# EAGLE board Qwiic_Multi_Port_Board-Panel (EAGLE 9.6.2), part 1 of 2
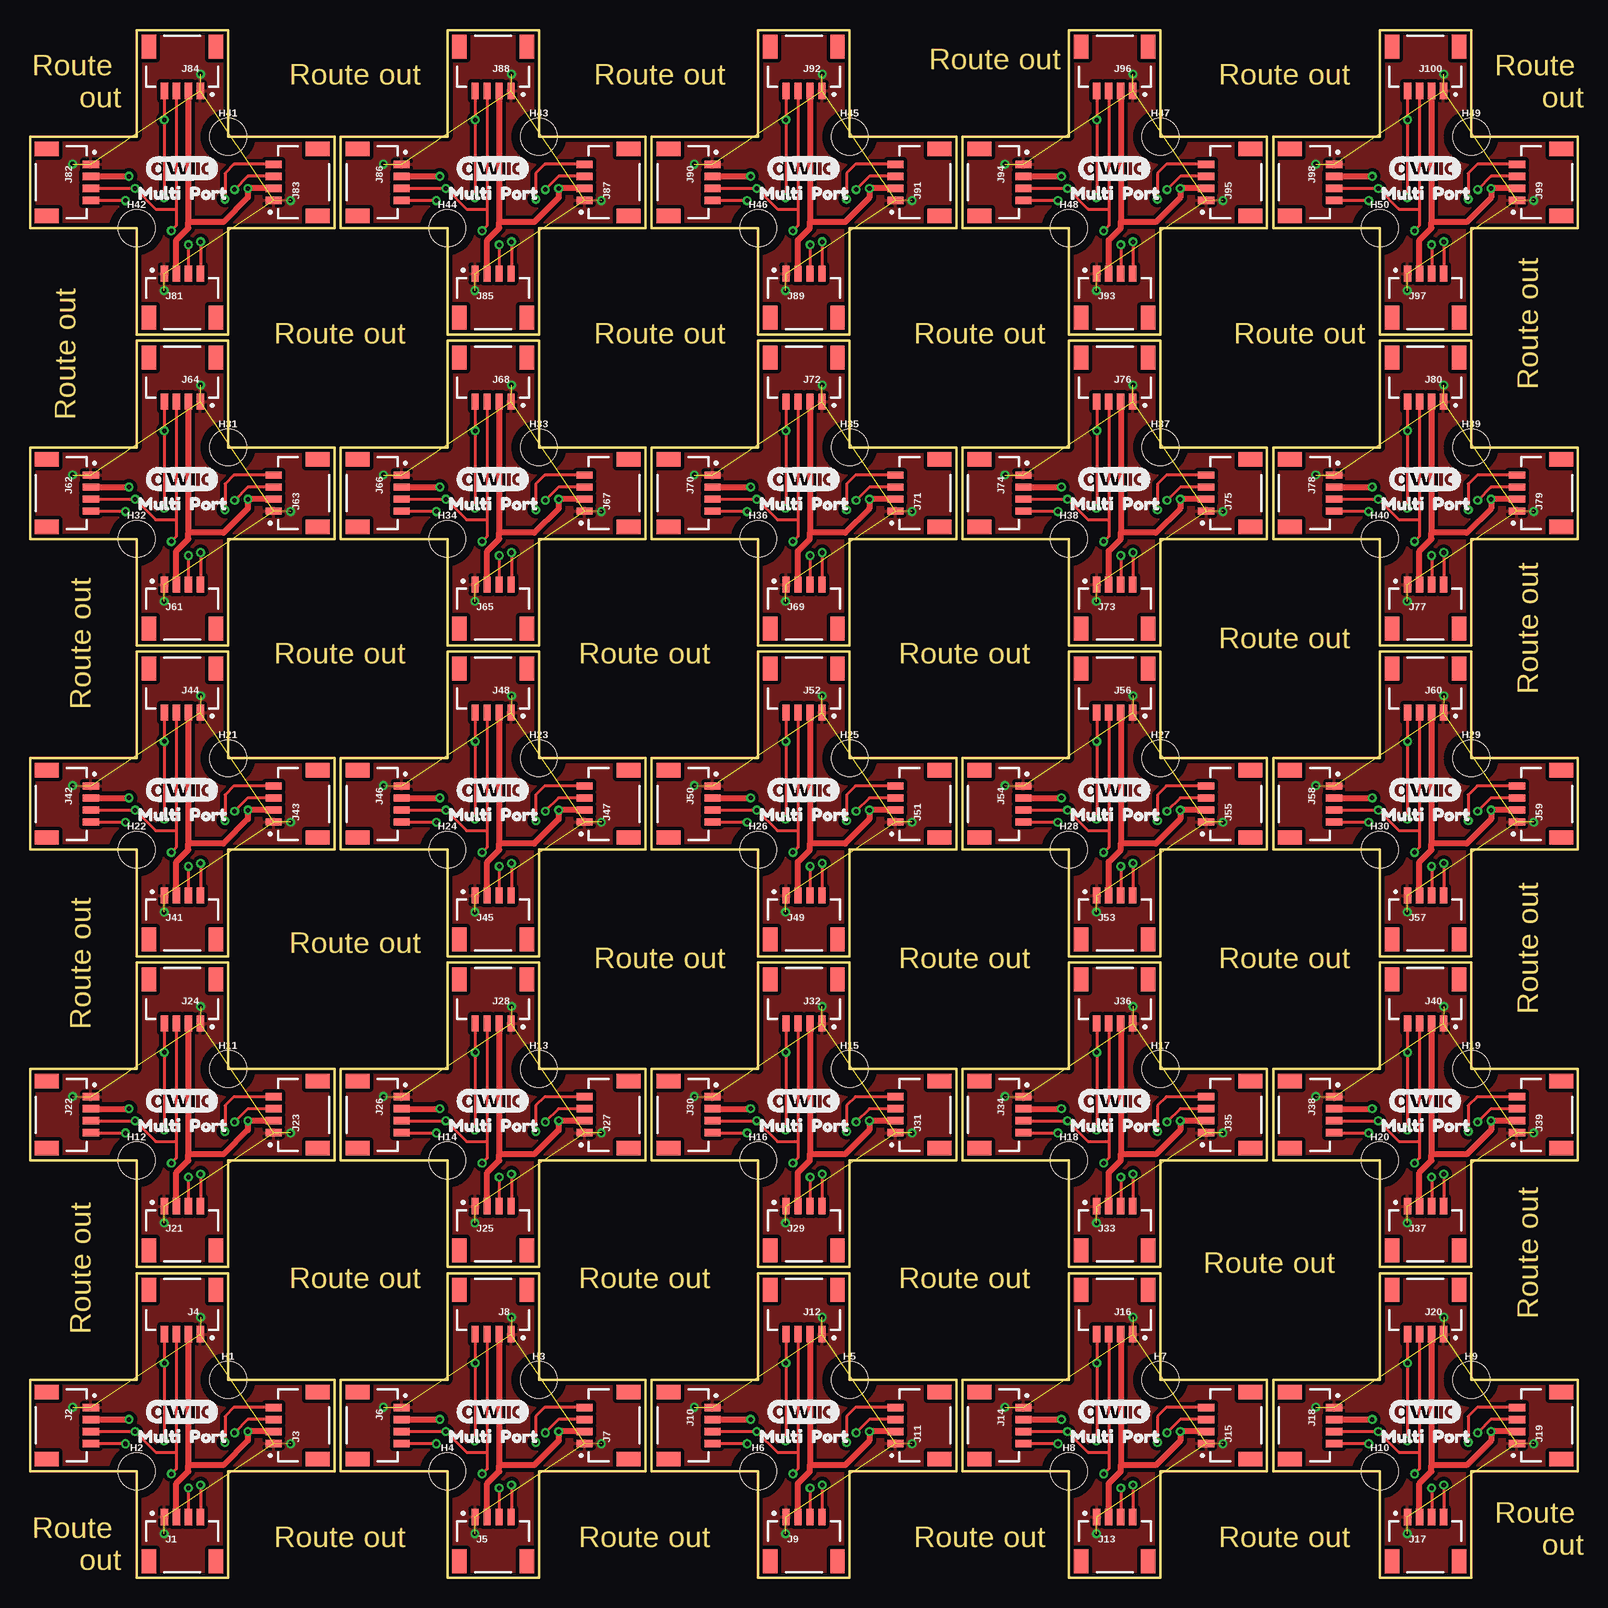
[diagram p0: board, top side]
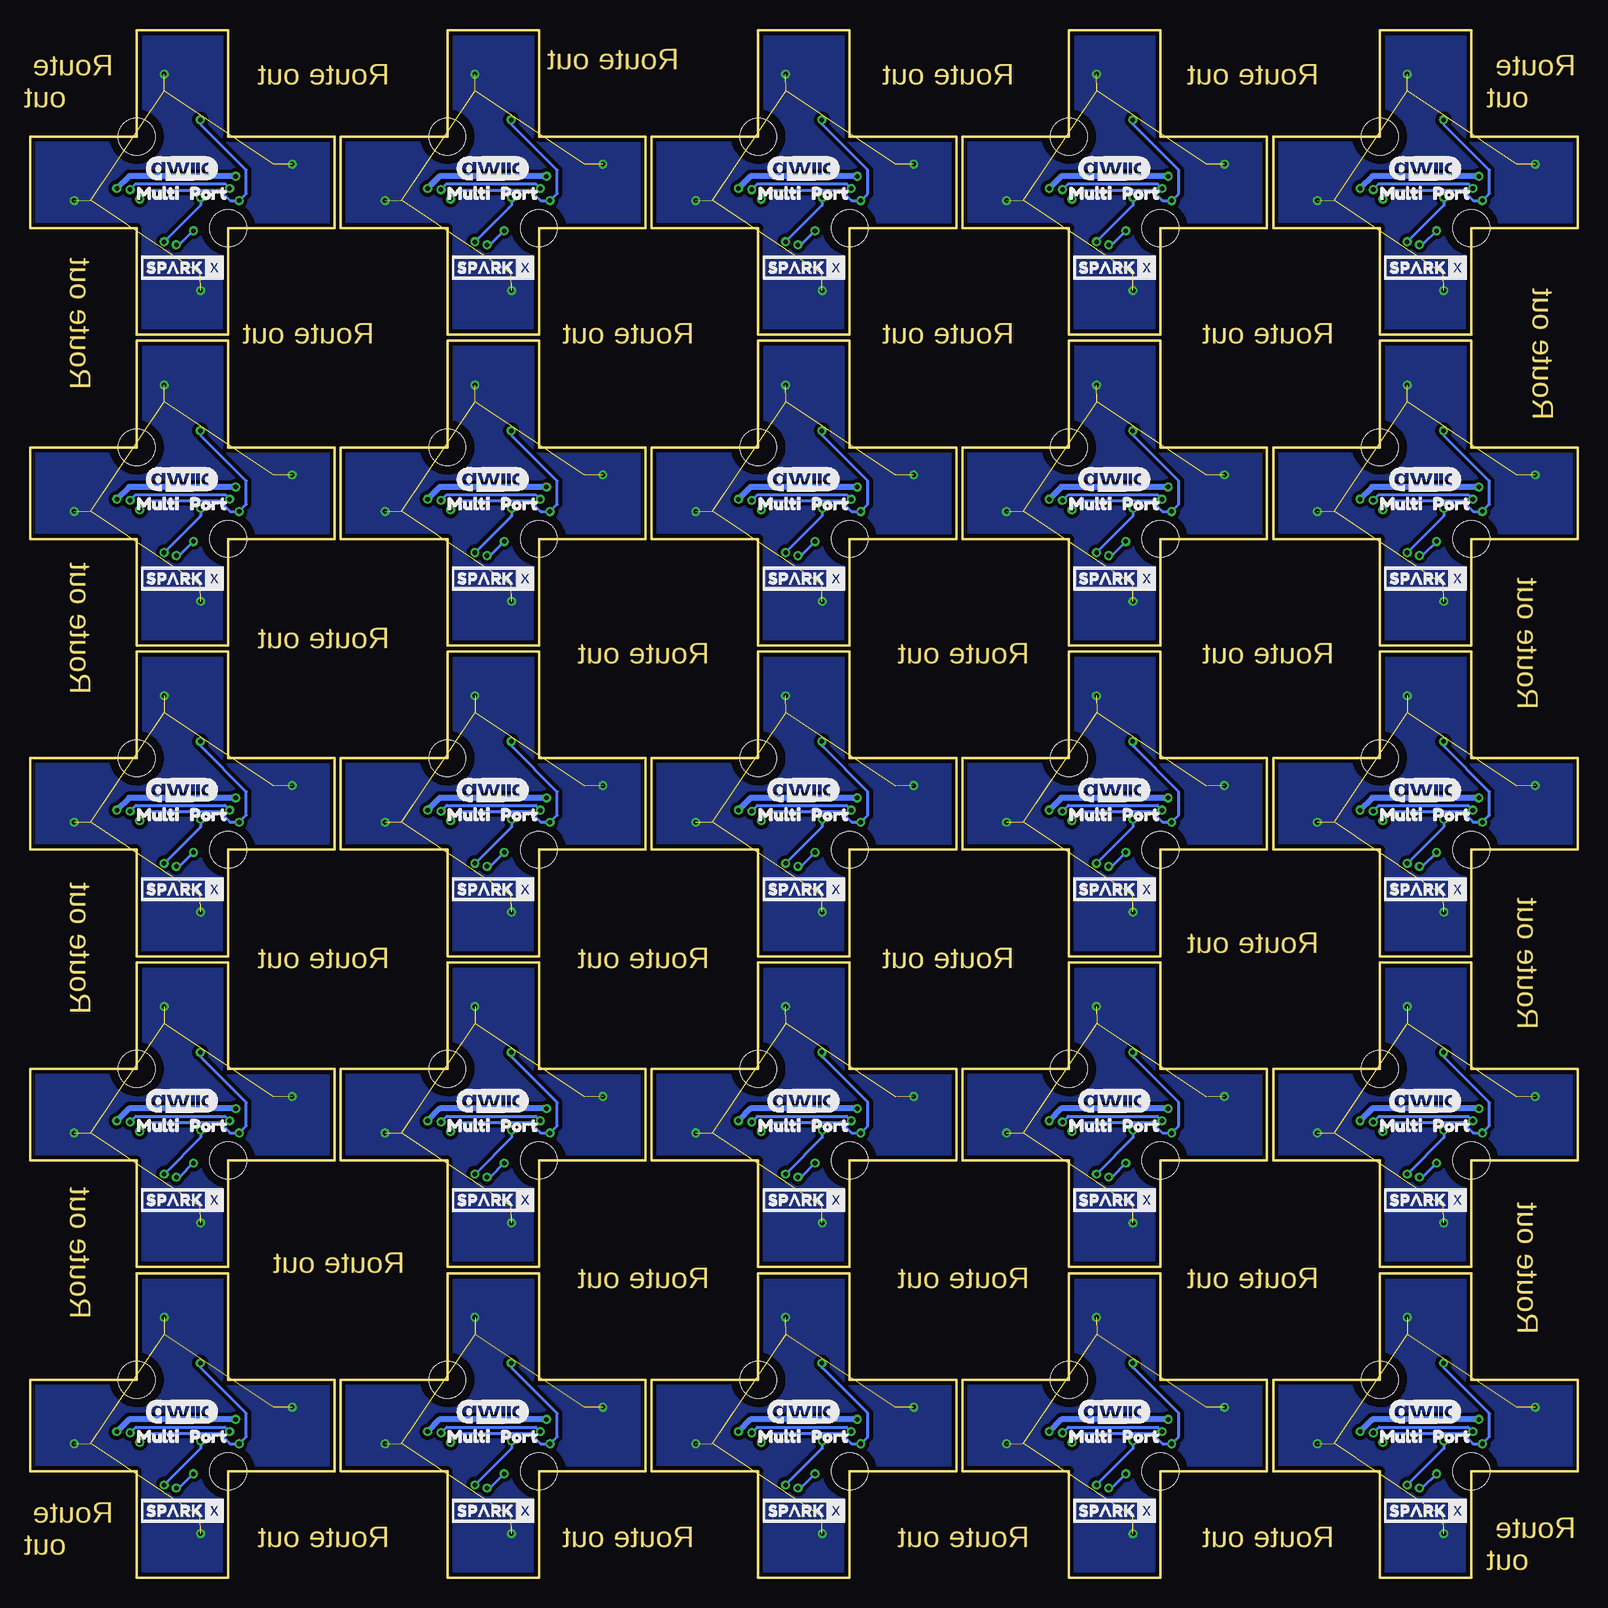
[diagram p1: board, bottom side, seen from below]

Size 129.03 x 129.03 mm. Coordinates in mm from the lower left corner, seen from the top.
Outline: 8.89,0 16.51,0 16.51,8.89 25.4,8.89 25.4,16.51 16.51,16.51 16.51,25.4 8.89,25.4 8.89,16.51 0,16.51 0,8.89 8.89,8.89 8.89,0
Outline: 34.8,0 42.42,0 42.42,8.89 51.31,8.89 51.31,16.51 42.42,16.51 42.42,25.4 34.8,25.4 34.8,16.51 25.91,16.51 25.91,8.89 34.8,8.89 34.8,0
Outline: 60.71,0 68.33,0 68.33,8.89 77.22,8.89 77.22,16.51 68.33,16.51 68.33,25.4 60.71,25.4 60.71,16.51 51.82,16.51 51.82,8.89 60.71,8.89 60.71,0
Outline: 86.61,0 94.23,0 94.23,8.89 103.12,8.89 103.12,16.51 94.23,16.51 94.23,25.4 86.61,25.4 86.61,16.51 77.72,16.51 77.72,8.89 86.61,8.89 86.61,0
Outline: 112.52,0 120.14,0 120.14,8.89 129.03,8.89 129.03,16.51 120.14,16.51 120.14,25.4 112.52,25.4 112.52,16.51 103.63,16.51 103.63,8.89 112.52,8.89 112.52,0
Outline: 8.89,25.91 16.51,25.91 16.51,34.8 25.4,34.8 25.4,42.42 16.51,42.42 16.51,51.31 8.89,51.31 8.89,42.42 0,42.42 0,34.8 8.89,34.8 8.89,25.91
Outline: 34.8,25.91 42.42,25.91 42.42,34.8 51.31,34.8 51.31,42.42 42.42,42.42 42.42,51.31 34.8,51.31 34.8,42.42 25.91,42.42 25.91,34.8 34.8,34.8 34.8,25.91
Outline: 60.71,25.91 68.33,25.91 68.33,34.8 77.22,34.8 77.22,42.42 68.33,42.42 68.33,51.31 60.71,51.31 60.71,42.42 51.82,42.42 51.82,34.8 60.71,34.8 60.71,25.91
Outline: 86.61,25.91 94.23,25.91 94.23,34.8 103.12,34.8 103.12,42.42 94.23,42.42 94.23,51.31 86.61,51.31 86.61,42.42 77.72,42.42 77.72,34.8 86.61,34.8 86.61,25.91
Outline: 112.52,25.91 120.14,25.91 120.14,34.8 129.03,34.8 129.03,42.42 120.14,42.42 120.14,51.31 112.52,51.31 112.52,42.42 103.63,42.42 103.63,34.8 112.52,34.8 112.52,25.91
Outline: 8.89,51.82 16.51,51.82 16.51,60.71 25.4,60.71 25.4,68.33 16.51,68.33 16.51,77.22 8.89,77.22 8.89,68.33 0,68.33 0,60.71 8.89,60.71 8.89,51.82
Outline: 34.8,51.82 42.42,51.82 42.42,60.71 51.31,60.71 51.31,68.33 42.42,68.33 42.42,77.22 34.8,77.22 34.8,68.33 25.91,68.33 25.91,60.71 34.8,60.71 34.8,51.82
Outline: 60.71,51.82 68.33,51.82 68.33,60.71 77.22,60.71 77.22,68.33 68.33,68.33 68.33,77.22 60.71,77.22 60.71,68.33 51.82,68.33 51.82,60.71 60.71,60.71 60.71,51.82
Outline: 86.61,51.82 94.23,51.82 94.23,60.71 103.12,60.71 103.12,68.33 94.23,68.33 94.23,77.22 86.61,77.22 86.61,68.33 77.72,68.33 77.72,60.71 86.61,60.71 86.61,51.82
Outline: 112.52,51.82 120.14,51.82 120.14,60.71 129.03,60.71 129.03,68.33 120.14,68.33 120.14,77.22 112.52,77.22 112.52,68.33 103.63,68.33 103.63,60.71 112.52,60.71 112.52,51.82
Outline: 8.89,77.72 16.51,77.72 16.51,86.61 25.4,86.61 25.4,94.23 16.51,94.23 16.51,103.12 8.89,103.12 8.89,94.23 0,94.23 0,86.61 8.89,86.61 8.89,77.72
Outline: 34.8,77.72 42.42,77.72 42.42,86.61 51.31,86.61 51.31,94.23 42.42,94.23 42.42,103.12 34.8,103.12 34.8,94.23 25.91,94.23 25.91,86.61 34.8,86.61 34.8,77.72
Outline: 60.71,77.72 68.33,77.72 68.33,86.61 77.22,86.61 77.22,94.23 68.33,94.23 68.33,103.12 60.71,103.12 60.71,94.23 51.82,94.23 51.82,86.61 60.71,86.61 60.71,77.72
Outline: 86.61,77.72 94.23,77.72 94.23,86.61 103.12,86.61 103.12,94.23 94.23,94.23 94.23,103.12 86.61,103.12 86.61,94.23 77.72,94.23 77.72,86.61 86.61,86.61 86.61,77.72
Outline: 112.52,77.72 120.14,77.72 120.14,86.61 129.03,86.61 129.03,94.23 120.14,94.23 120.14,103.12 112.52,103.12 112.52,94.23 103.63,94.23 103.63,86.61 112.52,86.61 112.52,77.72
Outline: 8.89,103.63 16.51,103.63 16.51,112.52 25.4,112.52 25.4,120.14 16.51,120.14 16.51,129.03 8.89,129.03 8.89,120.14 0,120.14 0,112.52 8.89,112.52 8.89,103.63
Outline: 34.8,103.63 42.42,103.63 42.42,112.52 51.31,112.52 51.31,120.14 42.42,120.14 42.42,129.03 34.8,129.03 34.8,120.14 25.91,120.14 25.91,112.52 34.8,112.52 34.8,103.63
Outline: 60.71,103.63 68.33,103.63 68.33,112.52 77.22,112.52 77.22,120.14 68.33,120.14 68.33,129.03 60.71,129.03 60.71,120.14 51.82,120.14 51.82,112.52 60.71,112.52 60.71,103.63
Outline: 86.61,103.63 94.23,103.63 94.23,112.52 103.12,112.52 103.12,120.14 94.23,120.14 94.23,129.03 86.61,129.03 86.61,120.14 77.72,120.14 77.72,112.52 86.61,112.52 86.61,103.63
Outline: 112.52,103.63 120.14,103.63 120.14,112.52 129.03,112.52 129.03,120.14 120.14,120.14 120.14,129.03 112.52,129.03 112.52,120.14 103.63,120.14 103.63,112.52 112.52,112.52 112.52,103.63
Copper layers (1*16): Top 0.035mm / dielectric 1.5mm / Bottom 0.035mm
Design rules "Qwiic_Multi_Port_Board": minimum track width 7mil, minimum drill 15mil, track to track 7mil, track to pad 7mil, pad to pad 7mil, via to via 7mil, smd to smd 7mil, copper to edge 7mil, drill to drill 7mil, minimum pad ring 7mil, minimum via ring 7mil, stop-mask expansion 4mil, vias tented up to drill 25mil, thermal gap 10mil

## Footprints (pad centres in the part's own frame; a part is rotated, then mirrored left to right if it is on the bottom)
STAND-OFF-TIGHT = hole 3.048: 0,0
JST04_1MM_RA = smd 0.6 x 1.35: 1 -1.5,0; 2 -0.5,0; 3 0.5,0; 4 1.5,0 | smd 1.2 x 2: NC1 2.8,-3.675; NC2 -2.8,-3.675

## Placement (x,y rotation side)
H1  STAND-OFFTIGHT  [STAND-OFF-TIGHT]  16.51,16.51 0 top
H2  STAND-OFFTIGHT  [STAND-OFF-TIGHT]  8.89,8.89 0 top
H3  STAND-OFFTIGHT  [STAND-OFF-TIGHT]  42.42,16.51 0 top
H4  STAND-OFFTIGHT  [STAND-OFF-TIGHT]  34.8,8.89 0 top
H5  STAND-OFFTIGHT  [STAND-OFF-TIGHT]  68.33,16.51 0 top
H6  STAND-OFFTIGHT  [STAND-OFF-TIGHT]  60.71,8.89 0 top
H7  STAND-OFFTIGHT  [STAND-OFF-TIGHT]  94.23,16.51 0 top
H8  STAND-OFFTIGHT  [STAND-OFF-TIGHT]  86.61,8.89 0 top
H9  STAND-OFFTIGHT  [STAND-OFF-TIGHT]  120.14,16.51 0 top
H10  STAND-OFFTIGHT  [STAND-OFF-TIGHT]  112.52,8.89 0 top
H11  STAND-OFFTIGHT  [STAND-OFF-TIGHT]  16.51,42.42 0 top
H12  STAND-OFFTIGHT  [STAND-OFF-TIGHT]  8.89,34.8 0 top
H13  STAND-OFFTIGHT  [STAND-OFF-TIGHT]  42.42,42.42 0 top
H14  STAND-OFFTIGHT  [STAND-OFF-TIGHT]  34.8,34.8 0 top
H15  STAND-OFFTIGHT  [STAND-OFF-TIGHT]  68.33,42.42 0 top
H16  STAND-OFFTIGHT  [STAND-OFF-TIGHT]  60.71,34.8 0 top
H17  STAND-OFFTIGHT  [STAND-OFF-TIGHT]  94.23,42.42 0 top
H18  STAND-OFFTIGHT  [STAND-OFF-TIGHT]  86.61,34.8 0 top
H19  STAND-OFFTIGHT  [STAND-OFF-TIGHT]  120.14,42.42 0 top
H20  STAND-OFFTIGHT  [STAND-OFF-TIGHT]  112.52,34.8 0 top
H21  STAND-OFFTIGHT  [STAND-OFF-TIGHT]  16.51,68.33 0 top
H22  STAND-OFFTIGHT  [STAND-OFF-TIGHT]  8.89,60.71 0 top
H23  STAND-OFFTIGHT  [STAND-OFF-TIGHT]  42.42,68.33 0 top
H24  STAND-OFFTIGHT  [STAND-OFF-TIGHT]  34.8,60.71 0 top
H25  STAND-OFFTIGHT  [STAND-OFF-TIGHT]  68.33,68.33 0 top
H26  STAND-OFFTIGHT  [STAND-OFF-TIGHT]  60.71,60.71 0 top
H27  STAND-OFFTIGHT  [STAND-OFF-TIGHT]  94.23,68.33 0 top
H28  STAND-OFFTIGHT  [STAND-OFF-TIGHT]  86.61,60.71 0 top
H29  STAND-OFFTIGHT  [STAND-OFF-TIGHT]  120.14,68.33 0 top
H30  STAND-OFFTIGHT  [STAND-OFF-TIGHT]  112.52,60.71 0 top
H31  STAND-OFFTIGHT  [STAND-OFF-TIGHT]  16.51,94.23 0 top
H32  STAND-OFFTIGHT  [STAND-OFF-TIGHT]  8.89,86.61 0 top
H33  STAND-OFFTIGHT  [STAND-OFF-TIGHT]  42.42,94.23 0 top
H34  STAND-OFFTIGHT  [STAND-OFF-TIGHT]  34.8,86.61 0 top
H35  STAND-OFFTIGHT  [STAND-OFF-TIGHT]  68.33,94.23 0 top
H36  STAND-OFFTIGHT  [STAND-OFF-TIGHT]  60.71,86.61 0 top
H37  STAND-OFFTIGHT  [STAND-OFF-TIGHT]  94.23,94.23 0 top
H38  STAND-OFFTIGHT  [STAND-OFF-TIGHT]  86.61,86.61 0 top
H39  STAND-OFFTIGHT  [STAND-OFF-TIGHT]  120.14,94.23 0 top
H40  STAND-OFFTIGHT  [STAND-OFF-TIGHT]  112.52,86.61 0 top
H41  STAND-OFFTIGHT  [STAND-OFF-TIGHT]  16.51,120.14 0 top
H42  STAND-OFFTIGHT  [STAND-OFF-TIGHT]  8.89,112.52 0 top
H43  STAND-OFFTIGHT  [STAND-OFF-TIGHT]  42.42,120.14 0 top
H44  STAND-OFFTIGHT  [STAND-OFF-TIGHT]  34.8,112.52 0 top
H45  STAND-OFFTIGHT  [STAND-OFF-TIGHT]  68.33,120.14 0 top
H46  STAND-OFFTIGHT  [STAND-OFF-TIGHT]  60.71,112.52 0 top
H47  STAND-OFFTIGHT  [STAND-OFF-TIGHT]  94.23,120.14 0 top
H48  STAND-OFFTIGHT  [STAND-OFF-TIGHT]  86.61,112.52 0 top
H49  STAND-OFFTIGHT  [STAND-OFF-TIGHT]  120.14,120.14 0 top
H50  STAND-OFFTIGHT  [STAND-OFF-TIGHT]  112.52,112.52 0 top
J1  QWIIC_RIGHT_ANGLE  [JST04_1MM_RA]  12.7,5.08 0 top
J2  QWIIC_RIGHT_ANGLE  [JST04_1MM_RA]  5.08,12.7 270 top
J3  QWIIC_RIGHT_ANGLE  [JST04_1MM_RA]  20.32,12.7 90 top
J4  QWIIC_RIGHT_ANGLE  [JST04_1MM_RA]  12.7,20.32 180 top
J5  QWIIC_RIGHT_ANGLE  [JST04_1MM_RA]  38.61,5.08 0 top
J6  QWIIC_RIGHT_ANGLE  [JST04_1MM_RA]  30.99,12.7 270 top
J7  QWIIC_RIGHT_ANGLE  [JST04_1MM_RA]  46.23,12.7 90 top
J8  QWIIC_RIGHT_ANGLE  [JST04_1MM_RA]  38.61,20.32 180 top
J9  QWIIC_RIGHT_ANGLE  [JST04_1MM_RA]  64.52,5.08 0 top
J10  QWIIC_RIGHT_ANGLE  [JST04_1MM_RA]  56.9,12.7 270 top
J11  QWIIC_RIGHT_ANGLE  [JST04_1MM_RA]  72.14,12.7 90 top
J12  QWIIC_RIGHT_ANGLE  [JST04_1MM_RA]  64.52,20.32 180 top
J13  QWIIC_RIGHT_ANGLE  [JST04_1MM_RA]  90.42,5.08 0 top
J14  QWIIC_RIGHT_ANGLE  [JST04_1MM_RA]  82.8,12.7 270 top
J15  QWIIC_RIGHT_ANGLE  [JST04_1MM_RA]  98.04,12.7 90 top
J16  QWIIC_RIGHT_ANGLE  [JST04_1MM_RA]  90.42,20.32 180 top
J17  QWIIC_RIGHT_ANGLE  [JST04_1MM_RA]  116.33,5.08 0 top
J18  QWIIC_RIGHT_ANGLE  [JST04_1MM_RA]  108.71,12.7 270 top
J19  QWIIC_RIGHT_ANGLE  [JST04_1MM_RA]  123.95,12.7 90 top
J20  QWIIC_RIGHT_ANGLE  [JST04_1MM_RA]  116.33,20.32 180 top
J21  QWIIC_RIGHT_ANGLE  [JST04_1MM_RA]  12.7,30.99 0 top
J22  QWIIC_RIGHT_ANGLE  [JST04_1MM_RA]  5.08,38.61 270 top
J23  QWIIC_RIGHT_ANGLE  [JST04_1MM_RA]  20.32,38.61 90 top
J24  QWIIC_RIGHT_ANGLE  [JST04_1MM_RA]  12.7,46.23 180 top
J25  QWIIC_RIGHT_ANGLE  [JST04_1MM_RA]  38.61,30.99 0 top
J26  QWIIC_RIGHT_ANGLE  [JST04_1MM_RA]  30.99,38.61 270 top
J27  QWIIC_RIGHT_ANGLE  [JST04_1MM_RA]  46.23,38.61 90 top
J28  QWIIC_RIGHT_ANGLE  [JST04_1MM_RA]  38.61,46.23 180 top
J29  QWIIC_RIGHT_ANGLE  [JST04_1MM_RA]  64.52,30.99 0 top
J30  QWIIC_RIGHT_ANGLE  [JST04_1MM_RA]  56.9,38.61 270 top
J31  QWIIC_RIGHT_ANGLE  [JST04_1MM_RA]  72.14,38.61 90 top
J32  QWIIC_RIGHT_ANGLE  [JST04_1MM_RA]  64.52,46.23 180 top
J33  QWIIC_RIGHT_ANGLE  [JST04_1MM_RA]  90.42,30.99 0 top
J34  QWIIC_RIGHT_ANGLE  [JST04_1MM_RA]  82.8,38.61 270 top
J35  QWIIC_RIGHT_ANGLE  [JST04_1MM_RA]  98.04,38.61 90 top
J36  QWIIC_RIGHT_ANGLE  [JST04_1MM_RA]  90.42,46.23 180 top
J37  QWIIC_RIGHT_ANGLE  [JST04_1MM_RA]  116.33,30.99 0 top
J38  QWIIC_RIGHT_ANGLE  [JST04_1MM_RA]  108.71,38.61 270 top
J39  QWIIC_RIGHT_ANGLE  [JST04_1MM_RA]  123.95,38.61 90 top
J40  QWIIC_RIGHT_ANGLE  [JST04_1MM_RA]  116.33,46.23 180 top
J41  QWIIC_RIGHT_ANGLE  [JST04_1MM_RA]  12.7,56.9 0 top
J42  QWIIC_RIGHT_ANGLE  [JST04_1MM_RA]  5.08,64.52 270 top
J43  QWIIC_RIGHT_ANGLE  [JST04_1MM_RA]  20.32,64.52 90 top
J44  QWIIC_RIGHT_ANGLE  [JST04_1MM_RA]  12.7,72.14 180 top
J45  QWIIC_RIGHT_ANGLE  [JST04_1MM_RA]  38.61,56.9 0 top
J46  QWIIC_RIGHT_ANGLE  [JST04_1MM_RA]  30.99,64.52 270 top
J47  QWIIC_RIGHT_ANGLE  [JST04_1MM_RA]  46.23,64.52 90 top
J48  QWIIC_RIGHT_ANGLE  [JST04_1MM_RA]  38.61,72.14 180 top
J49  QWIIC_RIGHT_ANGLE  [JST04_1MM_RA]  64.52,56.9 0 top
J50  QWIIC_RIGHT_ANGLE  [JST04_1MM_RA]  56.9,64.52 270 top
J51  QWIIC_RIGHT_ANGLE  [JST04_1MM_RA]  72.14,64.52 90 top
J52  QWIIC_RIGHT_ANGLE  [JST04_1MM_RA]  64.52,72.14 180 top
J53  QWIIC_RIGHT_ANGLE  [JST04_1MM_RA]  90.42,56.9 0 top
J54  QWIIC_RIGHT_ANGLE  [JST04_1MM_RA]  82.8,64.52 270 top
J55  QWIIC_RIGHT_ANGLE  [JST04_1MM_RA]  98.04,64.52 90 top
J56  QWIIC_RIGHT_ANGLE  [JST04_1MM_RA]  90.42,72.14 180 top
J57  QWIIC_RIGHT_ANGLE  [JST04_1MM_RA]  116.33,56.9 0 top
J58  QWIIC_RIGHT_ANGLE  [JST04_1MM_RA]  108.71,64.52 270 top
J59  QWIIC_RIGHT_ANGLE  [JST04_1MM_RA]  123.95,64.52 90 top
J60  QWIIC_RIGHT_ANGLE  [JST04_1MM_RA]  116.33,72.14 180 top
J61  QWIIC_RIGHT_ANGLE  [JST04_1MM_RA]  12.7,82.8 0 top
J62  QWIIC_RIGHT_ANGLE  [JST04_1MM_RA]  5.08,90.42 270 top
J63  QWIIC_RIGHT_ANGLE  [JST04_1MM_RA]  20.32,90.42 90 top
J64  QWIIC_RIGHT_ANGLE  [JST04_1MM_RA]  12.7,98.04 180 top
J65  QWIIC_RIGHT_ANGLE  [JST04_1MM_RA]  38.61,82.8 0 top
J66  QWIIC_RIGHT_ANGLE  [JST04_1MM_RA]  30.99,90.42 270 top
J67  QWIIC_RIGHT_ANGLE  [JST04_1MM_RA]  46.23,90.42 90 top
J68  QWIIC_RIGHT_ANGLE  [JST04_1MM_RA]  38.61,98.04 180 top
J69  QWIIC_RIGHT_ANGLE  [JST04_1MM_RA]  64.52,82.8 0 top
J70  QWIIC_RIGHT_ANGLE  [JST04_1MM_RA]  56.9,90.42 270 top
J71  QWIIC_RIGHT_ANGLE  [JST04_1MM_RA]  72.14,90.42 90 top
J72  QWIIC_RIGHT_ANGLE  [JST04_1MM_RA]  64.52,98.04 180 top
J73  QWIIC_RIGHT_ANGLE  [JST04_1MM_RA]  90.42,82.8 0 top
J74  QWIIC_RIGHT_ANGLE  [JST04_1MM_RA]  82.8,90.42 270 top
J75  QWIIC_RIGHT_ANGLE  [JST04_1MM_RA]  98.04,90.42 90 top
J76  QWIIC_RIGHT_ANGLE  [JST04_1MM_RA]  90.42,98.04 180 top
J77  QWIIC_RIGHT_ANGLE  [JST04_1MM_RA]  116.33,82.8 0 top
J78  QWIIC_RIGHT_ANGLE  [JST04_1MM_RA]  108.71,90.42 270 top
J79  QWIIC_RIGHT_ANGLE  [JST04_1MM_RA]  123.95,90.42 90 top
J80  QWIIC_RIGHT_ANGLE  [JST04_1MM_RA]  116.33,98.04 180 top
J81  QWIIC_RIGHT_ANGLE  [JST04_1MM_RA]  12.7,108.71 0 top
J82  QWIIC_RIGHT_ANGLE  [JST04_1MM_RA]  5.08,116.33 270 top
J83  QWIIC_RIGHT_ANGLE  [JST04_1MM_RA]  20.32,116.33 90 top
J84  QWIIC_RIGHT_ANGLE  [JST04_1MM_RA]  12.7,123.95 180 top
J85  QWIIC_RIGHT_ANGLE  [JST04_1MM_RA]  38.61,108.71 0 top
J86  QWIIC_RIGHT_ANGLE  [JST04_1MM_RA]  30.99,116.33 270 top
J87  QWIIC_RIGHT_ANGLE  [JST04_1MM_RA]  46.23,116.33 90 top
J88  QWIIC_RIGHT_ANGLE  [JST04_1MM_RA]  38.61,123.95 180 top
J89  QWIIC_RIGHT_ANGLE  [JST04_1MM_RA]  64.52,108.71 0 top
J90  QWIIC_RIGHT_ANGLE  [JST04_1MM_RA]  56.9,116.33 270 top
J91  QWIIC_RIGHT_ANGLE  [JST04_1MM_RA]  72.14,116.33 90 top
J92  QWIIC_RIGHT_ANGLE  [JST04_1MM_RA]  64.52,123.95 180 top
J93  QWIIC_RIGHT_ANGLE  [JST04_1MM_RA]  90.42,108.71 0 top
J94  QWIIC_RIGHT_ANGLE  [JST04_1MM_RA]  82.8,116.33 270 top
J95  QWIIC_RIGHT_ANGLE  [JST04_1MM_RA]  98.04,116.33 90 top
J96  QWIIC_RIGHT_ANGLE  [JST04_1MM_RA]  90.42,123.95 180 top
J97  QWIIC_RIGHT_ANGLE  [JST04_1MM_RA]  116.33,108.71 0 top
J98  QWIIC_RIGHT_ANGLE  [JST04_1MM_RA]  108.71,116.33 270 top
J99  QWIIC_RIGHT_ANGLE  [JST04_1MM_RA]  123.95,116.33 90 top
J100  QWIIC_RIGHT_ANGLE  [JST04_1MM_RA]  116.33,123.95 180 top
U$1  [QWIIC_6MM]  12.7,13.84 0 top
U$2  [SPARKX-SMALL]  12.7,5.59 0 bottom
U$3  [QWIIC_6MM]  12.7,13.84 0 bottom
U$4  [MULTI1]  8.13,11.81 0 top
U$5  [PORT2]  12.45,11.81 0 top
U$6  [SPARKX-SMALL]  38.61,5.59 0 bottom
U$7  [MULTI1]  17.4,11.81 0 bottom
U$8  [PORT2]  12.95,11.81 0 bottom
U$9  [MULTI1]  34.04,11.81 0 top
U$10  [PORT2]  38.35,11.81 0 top
U$11  [QWIIC_6MM]  38.61,13.84 0 top
U$12  [QWIIC_6MM]  38.61,13.84 0 bottom
U$13  [MULTI1]  43.31,11.81 0 bottom
U$14  [PORT2]  38.86,11.81 0 bottom
U$15  [SPARKX-SMALL]  64.52,5.59 0 bottom
U$16  [MULTI1]  59.94,11.81 0 top
U$17  [PORT2]  64.26,11.81 0 top
U$18  [QWIIC_6MM]  64.52,13.84 0 top
U$19  [QWIIC_6MM]  64.52,13.84 0 bottom
U$20  [MULTI1]  69.22,11.81 0 bottom
U$21  [PORT2]  64.77,11.81 0 bottom
U$22  [SPARKX-SMALL]  90.42,5.59 0 bottom
U$23  [MULTI1]  85.85,11.81 0 top
U$24  [PORT2]  90.17,11.81 0 top
U$25  [QWIIC_6MM]  90.42,13.84 0 top
U$26  [QWIIC_6MM]  90.42,13.84 0 bottom
U$27  [MULTI1]  95.12,11.81 0 bottom
U$28  [PORT2]  90.68,11.81 0 bottom
U$29  [SPARKX-SMALL]  116.33,5.59 0 bottom
U$30  [MULTI1]  111.76,11.81 0 top
U$31  [PORT2]  116.08,11.81 0 top
U$32  [QWIIC_6MM]  116.33,13.84 0 top
U$33  [QWIIC_6MM]  116.33,13.84 0 bottom
U$34  [MULTI1]  121.03,11.81 0 bottom
U$35  [PORT2]  116.59,11.81 0 bottom
U$36  [SPARKX-SMALL]  12.7,31.5 0 bottom
U$37  [MULTI1]  8.13,37.72 0 top
U$38  [PORT2]  12.45,37.72 0 top
U$39  [QWIIC_6MM]  12.7,39.75 0 top
U$40  [QWIIC_6MM]  12.7,39.75 0 bottom
U$41  [MULTI1]  17.4,37.72 0 bottom
U$42  [PORT2]  12.95,37.72 0 bottom
U$43  [SPARKX-SMALL]  38.61,31.5 0 bottom
U$44  [MULTI1]  34.04,37.72 0 top
U$45  [PORT2]  38.35,37.72 0 top
U$46  [QWIIC_6MM]  38.61,39.75 0 top
U$47  [QWIIC_6MM]  38.61,39.75 0 bottom
U$48  [MULTI1]  43.31,37.72 0 bottom
U$49  [PORT2]  38.86,37.72 0 bottom
U$50  [SPARKX-SMALL]  64.52,31.5 0 bottom
U$51  [MULTI1]  59.94,37.72 0 top
U$52  [PORT2]  64.26,37.72 0 top
U$53  [QWIIC_6MM]  64.52,39.75 0 top
U$54  [QWIIC_6MM]  64.52,39.75 0 bottom
U$55  [MULTI1]  69.22,37.72 0 bottom
U$56  [PORT2]  64.77,37.72 0 bottom
U$57  [SPARKX-SMALL]  90.42,31.5 0 bottom
U$58  [MULTI1]  85.85,37.72 0 top
U$59  [PORT2]  90.17,37.72 0 top
U$60  [QWIIC_6MM]  90.42,39.75 0 top
U$61  [QWIIC_6MM]  90.42,39.75 0 bottom
U$62  [MULTI1]  95.12,37.72 0 bottom
U$63  [PORT2]  90.68,37.72 0 bottom
U$64  [SPARKX-SMALL]  116.33,31.5 0 bottom
U$65  [MULTI1]  111.76,37.72 0 top
U$66  [PORT2]  116.08,37.72 0 top
U$67  [QWIIC_6MM]  116.33,39.75 0 top
U$68  [QWIIC_6MM]  116.33,39.75 0 bottom
U$69  [MULTI1]  121.03,37.72 0 bottom
U$70  [PORT2]  116.59,37.72 0 bottom
U$71  [SPARKX-SMALL]  12.7,57.4 0 bottom
U$72  [MULTI1]  8.13,63.63 0 top
U$73  [PORT2]  12.45,63.63 0 top
U$74  [QWIIC_6MM]  12.7,65.66 0 top
U$75  [QWIIC_6MM]  12.7,65.66 0 bottom
U$76  [MULTI1]  17.4,63.63 0 bottom
U$77  [PORT2]  12.95,63.63 0 bottom
U$78  [SPARKX-SMALL]  38.61,57.4 0 bottom
U$79  [MULTI1]  34.04,63.63 0 top
U$80  [PORT2]  38.35,63.63 0 top
U$81  [QWIIC_6MM]  38.61,65.66 0 top
U$82  [QWIIC_6MM]  38.61,65.66 0 bottom
U$83  [MULTI1]  43.31,63.63 0 bottom
U$84  [PORT2]  38.86,63.63 0 bottom
U$85  [SPARKX-SMALL]  64.52,57.4 0 bottom
U$86  [MULTI1]  59.94,63.63 0 top
U$87  [PORT2]  64.26,63.63 0 top
U$88  [QWIIC_6MM]  64.52,65.66 0 top
U$89  [QWIIC_6MM]  64.52,65.66 0 bottom
U$90  [MULTI1]  69.22,63.63 0 bottom
U$91  [PORT2]  64.77,63.63 0 bottom
U$92  [SPARKX-SMALL]  90.42,57.4 0 bottom
U$93  [MULTI1]  85.85,63.63 0 top
U$94  [PORT2]  90.17,63.63 0 top
U$95  [QWIIC_6MM]  90.42,65.66 0 top
U$96  [QWIIC_6MM]  90.42,65.66 0 bottom
U$97  [MULTI1]  95.12,63.63 0 bottom
U$98  [PORT2]  90.68,63.63 0 bottom
U$99  [SPARKX-SMALL]  116.33,57.4 0 bottom
U$100  [MULTI1]  111.76,63.63 0 top
U$101  [PORT2]  116.08,63.63 0 top
U$102  [QWIIC_6MM]  116.33,65.66 0 top
U$103  [QWIIC_6MM]  116.33,65.66 0 bottom
U$104  [MULTI1]  121.03,63.63 0 bottom
U$105  [PORT2]  116.59,63.63 0 bottom
U$106  [SPARKX-SMALL]  12.7,83.31 0 bottom
U$107  [MULTI1]  8.13,89.53 0 top
U$108  [PORT2]  12.45,89.53 0 top
U$109  [QWIIC_6MM]  12.7,91.57 0 top
U$110  [QWIIC_6MM]  12.7,91.57 0 bottom
U$111  [MULTI1]  17.4,89.53 0 bottom
U$112  [PORT2]  12.95,89.53 0 bottom
U$113  [SPARKX-SMALL]  38.61,83.31 0 bottom
U$114  [MULTI1]  34.04,89.53 0 top
U$115  [PORT2]  38.35,89.53 0 top
U$116  [QWIIC_6MM]  38.61,91.57 0 top
U$117  [QWIIC_6MM]  38.61,91.57 0 bottom
U$118  [MULTI1]  43.31,89.53 0 bottom
U$119  [PORT2]  38.86,89.53 0 bottom
U$120  [SPARKX-SMALL]  64.52,83.31 0 bottom
U$121  [MULTI1]  59.94,89.53 0 top
U$122  [PORT2]  64.26,89.53 0 top
U$123  [QWIIC_6MM]  64.52,91.57 0 top
U$124  [QWIIC_6MM]  64.52,91.57 0 bottom
U$125  [MULTI1]  69.22,89.53 0 bottom
U$126  [PORT2]  64.77,89.53 0 bottom
U$127  [SPARKX-SMALL]  90.42,83.31 0 bottom
U$128  [MULTI1]  85.85,89.53 0 top
U$129  [PORT2]  90.17,89.53 0 top
U$130  [QWIIC_6MM]  90.42,91.57 0 top
U$131  [QWIIC_6MM]  90.42,91.57 0 bottom
U$132  [MULTI1]  95.12,89.53 0 bottom
U$133  [PORT2]  90.68,89.53 0 bottom
U$134  [SPARKX-SMALL]  116.33,83.31 0 bottom
U$135  [MULTI1]  111.76,89.53 0 top
U$136  [PORT2]  116.08,89.53 0 top
U$137  [QWIIC_6MM]  116.33,91.57 0 top
U$138  [QWIIC_6MM]  116.33,91.57 0 bottom
U$139  [MULTI1]  121.03,89.53 0 bottom
U$140  [PORT2]  116.59,89.53 0 bottom
U$141  [SPARKX-SMALL]  12.7,109.22 0 bottom
U$142  [MULTI1]  8.13,115.44 0 top
U$143  [PORT2]  12.45,115.44 0 top
U$144  [QWIIC_6MM]  12.7,117.47 0 top
U$145  [QWIIC_6MM]  12.7,117.47 0 bottom
U$146  [MULTI1]  17.4,115.44 0 bottom
U$147  [PORT2]  12.95,115.44 0 bottom
U$148  [SPARKX-SMALL]  38.61,109.22 0 bottom
U$149  [MULTI1]  34.04,115.44 0 top
U$150  [PORT2]  38.35,115.44 0 top
U$151  [QWIIC_6MM]  38.61,117.47 0 top
U$152  [QWIIC_6MM]  38.61,117.47 0 bottom
U$153  [MULTI1]  43.31,115.44 0 bottom
U$154  [PORT2]  38.86,115.44 0 bottom
U$155  [SPARKX-SMALL]  64.52,109.22 0 bottom
U$156  [MULTI1]  59.94,115.44 0 top
U$157  [PORT2]  64.26,115.44 0 top
U$158  [QWIIC_6MM]  64.52,117.47 0 top
U$159  [QWIIC_6MM]  64.52,117.47 0 bottom
U$160  [MULTI1]  69.22,115.44 0 bottom
U$161  [PORT2]  64.77,115.44 0 bottom
U$162  [SPARKX-SMALL]  90.42,109.22 0 bottom
U$163  [MULTI1]  85.85,115.44 0 top
U$164  [PORT2]  90.17,115.44 0 top
U$165  [QWIIC_6MM]  90.42,117.47 0 top
U$166  [QWIIC_6MM]  90.42,117.47 0 bottom
U$167  [MULTI1]  95.12,115.44 0 bottom
U$168  [PORT2]  90.68,115.44 0 bottom
U$169  [SPARKX-SMALL]  116.33,109.22 0 bottom
U$170  [MULTI1]  111.76,115.44 0 top
U$171  [PORT2]  116.08,115.44 0 top
U$172  [QWIIC_6MM]  116.33,117.47 0 top
U$173  [QWIIC_6MM]  116.33,117.47 0 bottom
U$174  [MULTI1]  121.03,115.44 0 bottom
U$175  [PORT2]  116.59,115.44 0 bottom

## Library data of the parts
H1-H50 = SparkFun-Hardware
J1-J100 = SparkFun-Connectors; PROD_ID: CONN-13694
U$1 U$3 U$11 U$12 U$18 U$19 U$25 U$26 U$32 U$33 U$39 U$40 U$46 U$47 U$53 U$54 U$60 U$61 U$67 U$68 U$74 U$75 U$81 U$82 U$88 U$89 U$95 U$96 U$102 U$103 U$109 U$110 U$116 U$117 U$123 U$124 U$130 U$131 U$137 U$138 U$144 U$145 U$151 U$152 U$158 U$159 U$165 U$166 U$172 U$173 = SparkFun-Aesthetics
U$2 U$6 U$15 U$22 U$29 U$36 U$43 U$50 U$57 U$64 U$71 U$78 U$85 U$92 U$99 U$106 U$113 U$120 U$127 U$134 U$141 U$148 U$155 U$162 U$169 = SparkX
U$4 U$5 U$7-U$10 U$13 U$14 U$16 U$17 U$20 U$21 U$23 U$24 U$27 U$28 U$30 U$31 U$34 U$35 U$37 U$38 U$41 U$42 U$44 U$45 U$48 U$49 U$51 U$52 U$55 U$56 U$58 U$59 U$62 U$63 U$65 U$66 U$69 U$70 U$72 U$73 U$76 U$77 U$79 U$80 U$83 U$84 U$86 U$87 U$90 U$91 U$93 U$94 U$97 U$98 U$100 U$101 U$104 U$105 U$107 U$108 U$111 U$112 U$114 U$115 U$118 U$119 U$121 U$122 U$125 U$126 U$128 U$129 U$132 U$133 U$135 U$136 U$139 U$140 U$142 U$143 U$146 U$147 U$149 U$150 U$153 U$154 U$156 U$157 U$160 U$161 U$163 U$164 U$167 U$168 U$170 U$171 U$174 U$175 = buzzard_labels (75)

## Nets
3.3V: J1.2 J2.2 J3.2 J4.2
3.3V1: J5.2 J6.2 J7.2 J8.2
3.3V2: J9.2 J10.2 J11.2 J12.2
3.3V3: J13.2 J14.2 J15.2 J16.2
3.3V4: J17.2 J18.2 J19.2 J20.2
3.3V5: J21.2 J22.2 J23.2 J24.2
3.3V6: J25.2 J26.2 J27.2 J28.2
3.3V7: J29.2 J30.2 J31.2 J32.2
3.3V8: J33.2 J34.2 J35.2 J36.2
3.3V9: J37.2 J38.2 J39.2 J40.2
3.3V10: J41.2 J42.2 J43.2 J44.2
3.3V11: J45.2 J46.2 J47.2 J48.2
3.3V12: J49.2 J50.2 J51.2 J52.2
3.3V13: J53.2 J54.2 J55.2 J56.2
3.3V14: J57.2 J58.2 J59.2 J60.2
3.3V15: J61.2 J62.2 J63.2 J64.2
3.3V16: J65.2 J66.2 J67.2 J68.2
3.3V17: J69.2 J70.2 J71.2 J72.2
3.3V18: J73.2 J74.2 J75.2 J76.2
3.3V19: J77.2 J78.2 J79.2 J80.2
3.3V20: J81.2 J82.2 J83.2 J84.2
3.3V21: J85.2 J86.2 J87.2 J88.2
3.3V22: J89.2 J90.2 J91.2 J92.2
3.3V23: J93.2 J94.2 J95.2 J96.2
3.3V24: J97.2 J98.2 J99.2 J100.2
GND: J1.1 J2.1 J3.1 J4.1
GND1: J5.1 J6.1 J7.1 J8.1
GND2: J9.1 J10.1 J11.1 J12.1
GND3: J13.1 J14.1 J15.1 J16.1
GND4: J17.1 J18.1 J19.1 J20.1
GND5: J21.1 J22.1 J23.1 J24.1
GND6: J25.1 J26.1 J27.1 J28.1
GND7: J29.1 J30.1 J31.1 J32.1
GND8: J33.1 J34.1 J35.1 J36.1
GND9: J37.1 J38.1 J39.1 J40.1
GND10: J41.1 J42.1 J43.1 J44.1
GND11: J45.1 J46.1 J47.1 J48.1
GND12: J49.1 J50.1 J51.1 J52.1
GND13: J53.1 J54.1 J55.1 J56.1
GND14: J57.1 J58.1 J59.1 J60.1
GND15: J61.1 J62.1 J63.1 J64.1
GND16: J65.1 J66.1 J67.1 J68.1
GND17: J69.1 J70.1 J71.1 J72.1
GND18: J73.1 J74.1 J75.1 J76.1
GND19: J77.1 J78.1 J79.1 J80.1
GND20: J81.1 J82.1 J83.1 J84.1
GND21: J85.1 J86.1 J87.1 J88.1
GND22: J89.1 J90.1 J91.1 J92.1
GND23: J93.1 J94.1 J95.1 J96.1
GND24: J97.1 J98.1 J99.1 J100.1
SCL: J1.4 J2.4 J3.4 J4.4
SCL1: J5.4 J6.4 J7.4 J8.4
SCL2: J9.4 J10.4 J11.4 J12.4
SCL3: J13.4 J14.4 J15.4 J16.4
SCL4: J17.4 J18.4 J19.4 J20.4
SCL5: J21.4 J22.4 J23.4 J24.4
SCL6: J25.4 J26.4 J27.4 J28.4
SCL7: J29.4 J30.4 J31.4 J32.4
SCL8: J33.4 J34.4 J35.4 J36.4
SCL9: J37.4 J38.4 J39.4 J40.4
SCL10: J41.4 J42.4 J43.4 J44.4
SCL11: J45.4 J46.4 J47.4 J48.4
SCL12: J49.4 J50.4 J51.4 J52.4
SCL13: J53.4 J54.4 J55.4 J56.4
SCL14: J57.4 J58.4 J59.4 J60.4
SCL15: J61.4 J62.4 J63.4 J64.4
SCL16: J65.4 J66.4 J67.4 J68.4
SCL17: J69.4 J70.4 J71.4 J72.4
SCL18: J73.4 J74.4 J75.4 J76.4
SCL19: J77.4 J78.4 J79.4 J80.4
SCL20: J81.4 J82.4 J83.4 J84.4
SCL21: J85.4 J86.4 J87.4 J88.4
SCL22: J89.4 J90.4 J91.4 J92.4
SCL23: J93.4 J94.4 J95.4 J96.4
SCL24: J97.4 J98.4 J99.4 J100.4
SDA: J1.3 J2.3 J3.3 J4.3
SDA1: J5.3 J6.3 J7.3 J8.3
SDA2: J9.3 J10.3 J11.3 J12.3
SDA3: J13.3 J14.3 J15.3 J16.3
SDA4: J17.3 J18.3 J19.3 J20.3
SDA5: J21.3 J22.3 J23.3 J24.3
SDA6: J25.3 J26.3 J27.3 J28.3
SDA7: J29.3 J30.3 J31.3 J32.3
SDA8: J33.3 J34.3 J35.3 J36.3
SDA9: J37.3 J38.3 J39.3 J40.3
SDA10: J41.3 J42.3 J43.3 J44.3
SDA11: J45.3 J46.3 J47.3 J48.3
SDA12: J49.3 J50.3 J51.3 J52.3
SDA13: J53.3 J54.3 J55.3 J56.3
SDA14: J57.3 J58.3 J59.3 J60.3
SDA15: J61.3 J62.3 J63.3 J64.3
SDA16: J65.3 J66.3 J67.3 J68.3
SDA17: J69.3 J70.3 J71.3 J72.3
SDA18: J73.3 J74.3 J75.3 J76.3
SDA19: J77.3 J78.3 J79.3 J80.3
SDA20: J81.3 J82.3 J83.3 J84.3
SDA21: J85.3 J86.3 J87.3 J88.3
SDA22: J89.3 J90.3 J91.3 J92.3
SDA23: J93.3 J94.3 J95.3 J96.3
SDA24: J97.3 J98.3 J99.3 J100.3